# Altium PCB somiqboard.PcbDoc (part 6 of 10)
Units mm, origin at the board's own origin, x right, y up, seen from the top; angles counter-clockwise.
Board outline 110 x 96 mm, 4 copper layers (Top Layer, Ground_Plane, Power_Plane, Bottom Layer), stack 1.454 mm thick; 221 components, 356 nets, 1185 pads, 539 vias.
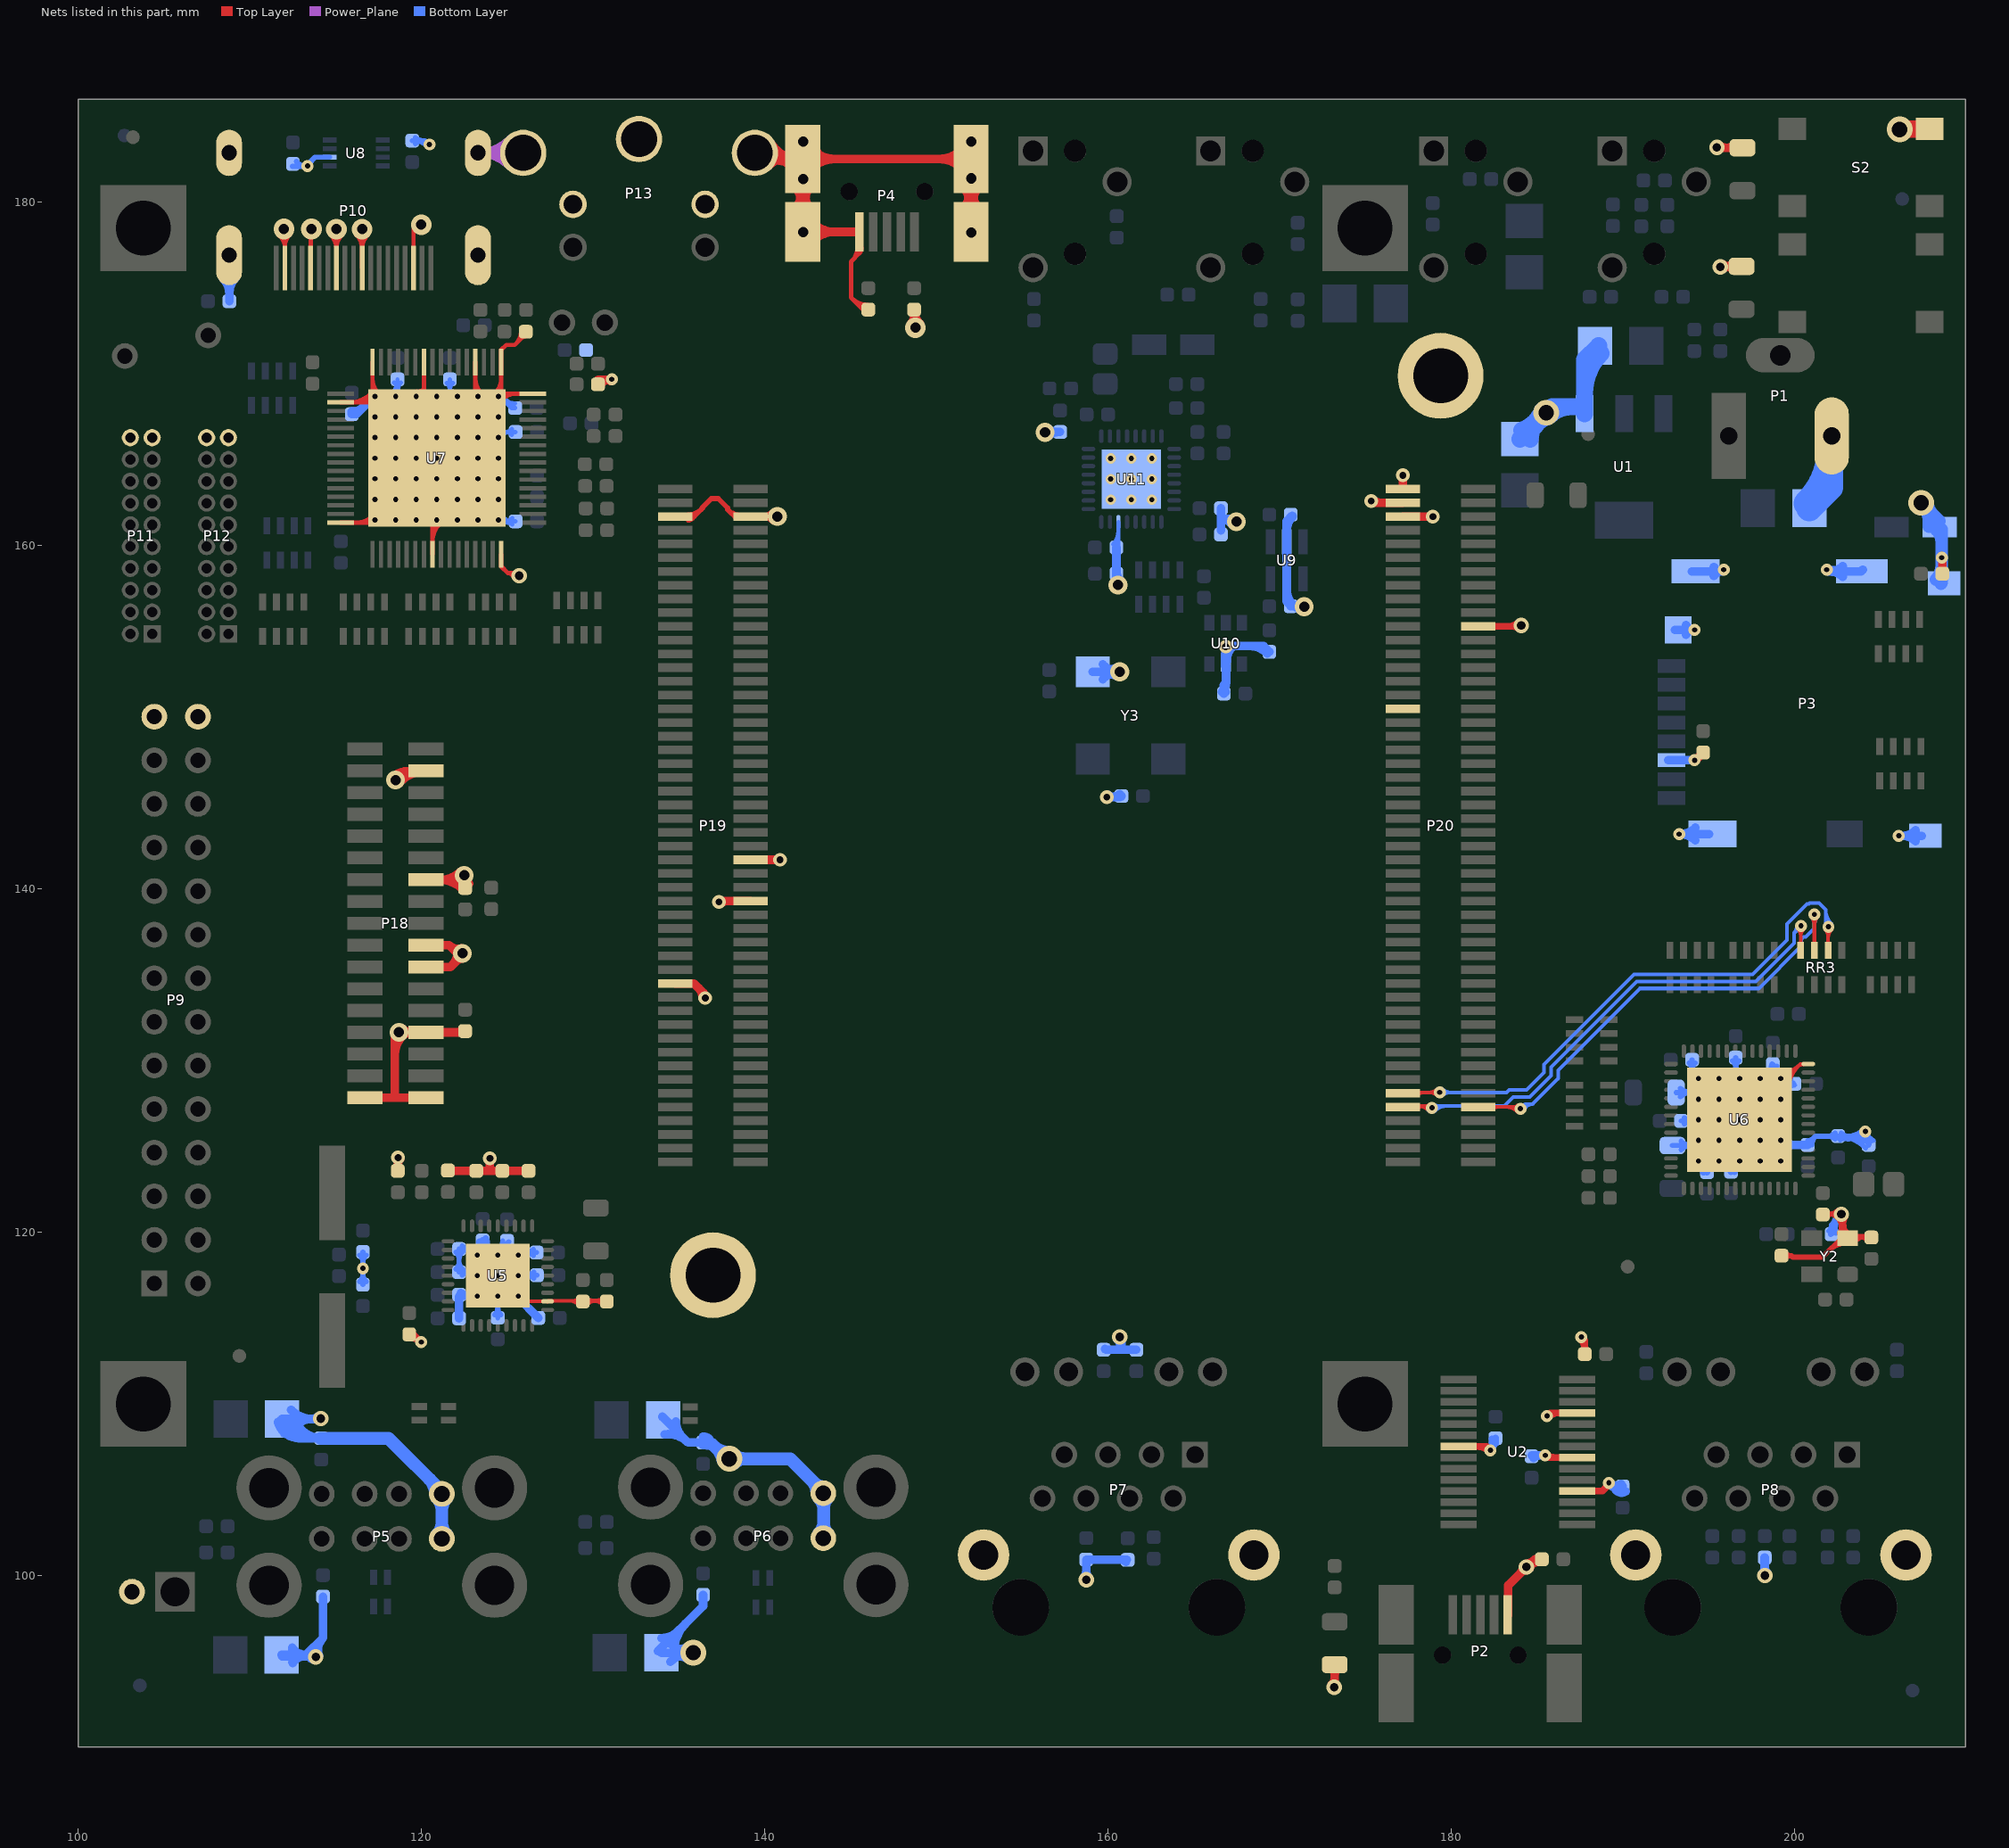
[diagram p8: the nets of this part, all layers, seen from the top]

## Via types
v1: diameter 0.7/0.7/0.7/0.7 (per signal layer), hole 0.3, Top Layer to Bottom Layer, tented both sides, 270 vias
v2: diameter 0.8, hole 0.3, Top Layer to Bottom Layer, tented both sides, 49 vias
v3: diameter 0.6/0.7/0.7/0.6 (per signal layer), hole 0.3, Top Layer to Bottom Layer, tented both sides, 47 vias
v4: diameter 0.6, hole 0.3, Top Layer to Bottom Layer, tented both sides, 43 vias
v5: diameter 1.1/1.1/1.1/1.1 (per signal layer), hole 0.6, Top Layer to Bottom Layer, tented both sides, 32 vias
v6: diameter 0.8/0.8/0.8/0.8 (per signal layer), hole 0.4, Top Layer to Bottom Layer, tented both sides, 31 vias
v7: diameter 0.9/0.9/0.9/0.9 (per signal layer), hole 0.5, Top Layer to Bottom Layer, tented both sides, 29 vias
v8: diameter 1.5/1.5/1.5/1.5 (per signal layer), hole 0.9, Top Layer to Bottom Layer, tented both sides, 14 vias
v9: diameter 1.2/1.2/1.2/1.2 (per signal layer), hole 0.6, Top Layer to Bottom Layer, tented both sides, 10 vias
v10: diameter 0.8/0.8/0.8/0.8 (per signal layer), hole 0.5, Top Layer to Bottom Layer, tented both sides, 6 vias
v11: diameter 1/1/1/1 (per signal layer), hole 0.5, Top Layer to Bottom Layer, tented both sides, 3 vias
v12: diameter 0.8/0.8/0.8/0.8 (per signal layer), hole 0.8, Top Layer to Bottom Layer, tented both sides, 2 vias
v13: diameter 1.2/1.2/1.2/1.2 (per signal layer), hole 1.2, Top Layer to Bottom Layer, tented both sides, 2 vias
v14: diameter 0.6/0.6/0.6/0.6 (per signal layer), hole 0.3, Top Layer to Bottom Layer, tented both sides, 1 vias

## Nets (pads, with @x,y where several pads share a name; then routed paths per layer and width w, separated by ;. In a path a pad name is that pad's centre, name@x,y a point inside that pad or via, vN(x,y) a via of type N, cw(c..) or ccw(c..) an arc to the next point about the centre after c; other vN are vias at no path point) (continued)
GND: B1.2 C1.2 C2.2 C3.2 C4.1 C5.1 C6.2 C7.1 C8.2 C9.2 C10.2 C12.2 C13.2 C14.1 C15.1 C16.2 C17.2 C18.2 C19.2 C20.2 C21.2 C22.2 C23.2 C24.2 C25.2 C26.2 C27.2 C28.2 C29.2 C30.2 C31.2 C32.2 C33.2 C34.2 C35.2 C36.2 C37.2 C38.1 C39.1 C40.1 C41.1 C42.1 C43.1 C44.2 C45.1 C46.1 C47.1 C48.1 C49.1 C50.1 C51.2 C52.1 C53.2 C54.2 C55.2 C56.2 C57.2 C58.2 C59.2 C60.2 C61.2 C63.2 C67.2 C68.2 C70.2 C74.2 C77.2 C79.2 C84.2 C85.2 D1.2 D2.2 D3.2 L1.2 P1.2 P2.5 P3.6 P3.9 P3.11 P3.12 P3.13 P3.14 P3.15 P4.5 P4.6 P4.7 P5.A4 P5.B4 P6.A4 P6.B4 P7.13 P8.13 P9.27 P9.28 P10.2 P10.5 P10.8 P10.11 P10.17 P10.20 P10.21 P10.22 P10.23 P11.19 P11.20 P12.19 P12.20 P13.1 P13.2 P13.5 P13.6 P13.7 P18.4 P18.14 P18.20 P18.22 P18.28 P18.33 P18.34 P19.5 P19.6 P19.55 P19.61 P19.74 P20.2 P20.4 P20.6 P20.21 pad.0@137,117.5 pad.0@179.4,169.9 R4.1 R6.2 R8.2 R9.2 R10.2 R11.2 R16.1 R17.1 R18.1 R19.1 R20.2 R33.1 R36.1 R48.1 R58.1 R100.2 S2.2 U1.1 U2.7 U2.18 U2.21 U2.25 U5.11 U5.37 U6.14 U6.57 U7.16 U7.17 U7.20 U7.26 U7.32 U7.34 U7.48 U7.56 U7.64 U7.65 U8.2 U9.2 U10.2 U11.6 U11.33 Y2.2 Y3.2 | length 672.4
  Top Layer w0.12: v9@112.053,178.422 v9@112.065,178.434
  Top Layer w0.2: U5.37@125.683,116.076 cw(c125.725,115.725) U5.37@125.975,115.975 ; U5.37@125.729,116.087 cw(c125.785,115.935) U5.37@125.9,116.05 ; U5.37@125.853,116.224 ccw(c126.027,116.177) U5.37@125.9,116.05 ; U5.37@125.86,116.268 ccw(c126.254,116.254) U5.37@125.975,115.975 ; U5.11@127.35,115.95 127.4,116 C22.2@129.45,116 ; U5.11@127.36,115.975 U5.37@125.975,115.975 ; 128.619,116 cw(c128.619,115.177) C22.2@129.201,115.759 ; 128.759,116 ccw(c128.759,116.625) C22.2@129.201,116.183 ; U6.57@197.618,128.553 ccw(c198.26,130.17) U6.57@199.49,128.94 ; U6.57@197.691,128.739 ccw(c198.382,130.478) U6.57@199.705,129.155 ; U6.57@197.765,128.925 ccw(c198.504,130.785) 199.92,129.37 ; U6.57@197.839,129.111 ccw(c198.627,131.093) 200.135,129.585 ; U6.57@197.913,129.297 ccw(c198.749,131.401) 200.35,129.8 ; U6.57@198.009,129.265 cw(c197.911,128.967) U6.57@198.223,128.934 ; v4(198.024,128.955) cw(c198.36,128.836) U6.57@198.392,129.191 ; U6.57@198.148,128.798 cw(c198.321,128.58) U6.57@198.353,128.856 ; U6.57@198.181,129.079 ccw(c198.72,129.505) U6.57@198.64,128.823 ; U6.57@198.213,128.888 cw(c198.611,128.747) U6.57@198.649,129.168 ; U6.57@198.222,128.927 cw(c198.362,128.908) U6.57@198.378,129.048 ; U6.57@198.453,128.637 ccw(c198.242,129.576) U6.57@199.055,129.062 ; U6.57@198.637,128.447 ccw(c198.231,129.151) U6.57@199.028,128.994 ; U6.57@198.667,128.841 ccw(c198.583,129.437) U6.57@199.064,129.075 ; U6.57@198.674,129.179 cw(c198.678,128.403) v4(199.224,128.955) ; U6.57@198.834,128.865 cw(c198.885,128.505) U6.57@199.104,128.795 ; U6.57@198.924,128.744 ccw(c198.819,129.211) v4(199.224,128.955) ; U6.57@199.018,128.668 ccw(c198.805,129.038) v4(199.224,128.955) ; U6.57@199.075,128.822 cw(c198.693,128.482) U6.57@199.159,128.272 ; U6.57@199.096,127.154 cw(c201.014,127.66) U6.57@199.612,129.062 ; U6.57@199.102,127.596 cw(c198.821,127.231) U6.57@199.279,127.291 ; U6.57@199.104,127.915 ccw(c198.445,128.797) U6.57@199.535,128.64 ; U6.57@199.114,127.922 ccw(c198.861,128.308) U6.57@199.313,128.214 ; U6.57@199.12,128.061 ccw(c199.393,127.983) v4(199.224,127.755) ; U6.57@199.177,128.761 ccw(c199.263,129.118) U6.57@199.56,128.901 ; U6.57@199.199,128.338 ccw(c199.576,128.231) U6.57@199.343,127.916 ; U6.57@199.224,129.155 ccw(c199.224,130.316) 200.045,129.495 ; U6.57@199.265,129.151 ccw(c199.387,129.736) U6.57@199.714,129.236 ; U6.57@199.271,129.149 ccw(c199.416,129.75) 199.914,129.385 ; U6.57@199.28,129.147 ccw(c199.34,129.356) U6.57@199.445,129.165 ; U6.57@199.283,127.26 cw(c199.783,127.326) U6.57@199.383,127.633 ; U6.57@199.286,128.554 ccw(c198.945,128.707) v4(199.224,128.955) ; U6.57@199.29,127.205 cw(c201.403,127.762) U6.57@199.858,129.308 ; U6.57@199.319,128.244 ccw(c199.813,128.142) U6.57@199.391,127.865 ; U6.57@199.333,129.123 ccw(c199.497,129.374) U6.57@199.673,129.132 ; U6.57@199.35,129 U6.57@199.55,129 ; U6.57@199.379,129.081 ccw(c199.55,129.22) U6.57@199.55,129 ; U6.57@199.409,128.879 cw(c200.546,128.413) 200.072,129.547 ; U6.57@199.416,128.899 cw(c200.135,128.691) U6.57@199.774,129.346 ; U6.57@199.416,128.899 cw(c199.55,128.861) U6.57@199.55,129 ; U6.57@199.42,128.914 cw(c199.78,128.839) U6.57@199.579,129.147 ; U6.57@199.466,128.162 cw(c198.854,128.25) v4(199.224,127.755) ; U6.57@199.469,127.351 ccw(c198.859,127.258) v4(199.224,127.755) ; U6.57@199.483,127.256 cw(c201.793,127.865) 200.104,129.554 ; U6.57@199.626,129.36 ccw(c199.915,128.672) v4(199.224,128.955) ; U6.57@199.677,127.307 cw(c202.182,127.968) 200.35,129.8 ; U6.57@199.704,129.154 cw(c199.224,129.633) v4(199.224,128.955) ; U6.57@199.737,129.143 cw(c199.339,129.434) v4(199.224,128.955) ; 200.175,129.625 cw(c200.549,129.251) U6.14@200.549,129.78 ; U6.14@200.824,129.805 200.819,129.8 200.35,129.8 ; C45.1@201.676,121.085 v7@202.415,121.085 ; C45.1@201.821,121.085 cw(c201.821,120.121) v7@202.503,120.803 ; C45.1@201.888,121.243 ccw(c202.27,121.625) 202.27,121.085 ; C45.1@201.91,120.843 cw(c202.415,120.437) v7@202.415,121.085 ; C45.1@201.99,121.085 ccw(c201.99,121.81) v7@202.503,121.297 ; v7@202.65,121.05 v7@202.415,121.085 ; U5.37@125.9,116.05 U5.37@125.975,115.975 ; U6.57@199.55,129 200.35,129.8 ; U6.57@197.869,128.828 ccw(c198.248,129.139) 198.2,128.651 cw(c198.248,129.139) U6.57@197.869,128.828
  Top Layer w0.21: P10.2@112.053,176.167 P10.2@112.053,177.38
  Top Layer w0.25: v9@111.711,178.073 cw(c111.177,177.379) P10.2@112.053,177.379 ; P10.2@112.053,177.38 v9@112.053,178.422 ; P10.2@112.053,177.43 cw(c113.02,177.43) v9@112.336,178.114 ; P10.5@113.563,176.153 v9@113.563,178.41 ; v9@114.717,178.112 cw(c113.906,177.301) 115.053,177.301 cw(c116.199,177.301) v9@115.388,178.112 ; P10.8@115.053,176.167 v9(115.053,178.447) ; U7.48@115.304,161.35 117.15,161.35 U7.65@117.2,161.4 ; U7.34@115.304,168.35 117.35,168.35 U7.65@117.45,168.45 ; U7.34@115.795,168.35 ccw(c115.795,170.209) U7.65@117.11,168.894 ; v9@116.217,178.112 cw(c115.406,177.301) 116.553,177.301 cw(c117.699,177.301) v9@116.888,178.112 ; 116.278,161.35 ccw(c116.278,162.526) U7.65@117.11,161.694 ; 116.399,168.35 ccw(c116.399,169.605) U7.65@117.286,168.718 ; P10.11@116.553,176.167 v9(116.553,178.447) ; 116.882,161.35 ccw(c116.882,161.922) U7.65@117.286,161.518 ; U7.65@117.002,168.35 ccw(c117.002,169.002) U7.65@117.463,168.541 ; U7.65@117.154,168.904 U7.32@117.154,170.7 ; 117.154,169.122 ccw(c117.726,169.122) U7.65@117.322,168.718 ; 117.154,169.726 ccw(c118.33,169.726) U7.65@117.498,168.894 ; P10.17@119.553,176.167 119.553,178.453 119.556,178.45 119.85,178.45 v9@120,178.3 ; U7.65@119.7,168.675 120.154,169.129 ; U7.65@119.728,168.974 ccw(c119.775,169.508) 120.154,169.129 ; U7.65@119.847,168.935 ccw(c119.966,169.129) 120.078,168.931 ccw(c120.176,168.756) U7.65@119.977,168.732 ; U7.65@119.94,168.853 ccw(c119.869,169.129) 120.154,169.129 ; U7.65@119.979,168.702 cw(c120.576,168.706) 120.154,169.129 ; U7.26@120.154,170.7 120.154,169.129 ; U7.56@120.654,159.5 120.654,161.304 U7.65@120.9,161.55 ; U7.56@120.654,160.233 cw(c122.171,160.233) U7.65@121.098,161.306 ; 120.654,160.836 cw(c121.568,160.836) U7.65@120.922,161.482 ; U7.65@123.154,169.023 ccw(c124.827,169.023) U7.65@123.644,167.84 ; 123.154,169.122 ccw(c123.726,169.122) U7.65@123.322,168.718 ; 123.154,169.726 ccw(c124.33,169.726) U7.65@123.498,168.894 ; U7.20@123.154,170.7 123.154,169.071 U7.65@123.475,168.75 ; U7.65@123.211,168.441 cw(c123.135,168.231) 123.351,168.289 cw(c123.488,168.326) U7.65@123.425,168.453 ; U7.65@124.31,168.894 ccw(c123.478,169.726) 124.654,169.726 ; U7.65@124.486,168.718 ccw(c124.082,169.122) 124.654,169.122 ; U7.65@124.5,168.7 124.65,168.85 U7.65@124.654,168.85 ; U7.65@124.522,168.682 cw(c124.926,168.278) 124.926,168.85 ; U7.64@124.654,159.5 124.654,158.796 125.05,158.4 ; U7.65@124.654,168.604 U7.65@124.654,168.7 ; U7.65@124.698,168.506 cw(c125.53,167.674) 125.53,168.85 ; v7@125.39,158.151 ccw(c125.05,158.043) 125.05,158.4 ; 125.533,171.783 ccw(c124.85,172.466) C53.2@125.816,172.466 ; v7(125.7,158.25) 125.7,158.4 125.05,158.4 ; C53.2@125.835,172.085 cw(c126.091,171.829) C53.2@126.091,172.191 ; C53.2@126.1,172.5 126.1,172.35 125.45,171.7 124.95,171.7 124.654,171.404 U7.17@124.654,170.7 U7.65@124.654,168.85 ; U7.16@126.504,168.85 U7.65@124.654,168.85 ; C22.2@129.45,116 129.472,116.022 C24.2@130.886,116.022 ; C22.2@129.607,115.777 cw(c130.2,115.184) 130.2,116.022 ; C22.2@129.607,116.165 ccw(c129.954,116.512) 129.954,116.022 ; 130.023,116.022 cw(c130.023,115.184) C24.2@130.616,115.777 ; 130.269,116.022 ccw(c130.269,116.512) C24.2@130.616,116.165 ; 145.058,174.442 ccw(c146.05,175.434) R100.2@146.05,174.031 ; 145.082,176.582 ccw(c144.283,177.381) P4.5@145.413,177.381 ; P4.5@145.45,177.293 cw(c145.236,177.079) 145.538,177.079 cw(c145.84,177.079) P4.5@145.626,177.293 ; 145.485,174.015 ccw(c146.05,174.58) R100.2@146.05,173.781 ; 145.509,177.009 ccw(c145.137,177.381) P4.5@145.663,177.381 ; P4.5@145.538,178.281 145.538,177.038 145.05,176.55 145.05,174.45 145.8,173.7 R100.2@146.05,173.7
  Top Layer w0.3: P19.6@134.8,161.7 135.9,161.7 136.4,162.2 136.4,162.24 136.91,162.75 137.3,162.75 137.85,162.2 137.85,162.105 138.055,161.9 ; P19.6@135.55,161.5 ccw(c135.55,161.862) 135.806,161.606 ; P19.6@135.55,161.8 ccw(c135.55,162.886) 136.318,162.118 ; P19.5@138.25,161.7 138.25,161.8 138.15,161.9 ; P19.5@138.354,161.673 ccw(c138.055,161.59) 138.055,161.9 ; P19.5@138.426,161.797 cw(c138.331,162.176) 138.055,161.9 ; P19.5@138.439,161.799 cw(c138.399,162.148) 138.15,161.9 ; P19.5@139.2,161.7 v5(140.75,161.7) ; P19.5@139.783,161.7 cw(c139.783,160.733) v5@140.467,161.417 ; P19.5@139.785,161.7 ccw(c139.785,162.665) v5@140.467,161.983 ; v7@184.05,155.3 v7(184.1,155.35) ; R20.2@199.263,118.638 199.838,118.638 ; R20.2@199.446,118.467 cw(c199.838,118.102) 199.838,118.638 ; R20.2@199.446,118.809 ccw(c199.838,119.174) 199.838,118.638 ; 202.079,118.979 cw(c202.975,118.083) Y2.2@202.975,119.35 ; v7@202.538,120.838 cw(c202.026,120.326) 202.75,120.326 cw(c203.474,120.326) v7@202.962,120.838 ; v7@202.6,120.79 cw(c202.296,120.264) 202.883,120.422 ; Y2.2@202.65,119.95 202.7,119.9 202.75,119.95 v7(202.75,121.05) ; 202.75,120.193 ccw(c203.518,120.193) Y2.2@202.975,119.65 ; v7@202.75,120.917 ccw(c204.242,120.917) Y2.2@203.187,119.862 ; 202.926,120.262 cw(c203.738,120.479) v7@203.01,120.9 ; Y2.2@203.487,119.862 ccw(c203.731,120.106) 203.731,119.761 ; Y2.2@203.495,119.446 cw(c204.216,118.778) 204.216,119.761 202.839,119.761 202.85,119.75 201.65,118.55 199.926,118.55 199.838,118.638 ; 203.749,119.761 cw(c203.749,118.949) C50.1@204.323,119.523 ; 204.044,119.761 ccw(c204.044,120.156) C50.1@204.323,119.877 ; 138.055,161.9 138.15,161.9
  Top Layer w0.305: P13.5@139.45,182.8 139.719,182.531 P4.6@142.238,182.531 cw(c142.238,184.63) P13.5@140.456,183.521 ; P13.5@139.939,183.198 ccw(c141.14,183.946) 141.14,182.531 ; P13.5@139.971,182.17 cw(c140.585,181.343) 140.852,182.338 ; P13.5@140.198,183.359 ccw(c141.689,184.288) P4.6@141.689,182.531 ; P13.5@140.286,182.041 cw(c141.47,180.857) P4.6@141.47,182.531 ; P13.5@140.319,183.042 ccw(c141.242,183.204) 141,182.298 ; P4.6@141.621,181.914 ccw(c140.131,180.424) 140.131,182.531 ccw(c140.131,184.638) P4.6@141.621,183.148 ; P4.6@141.837,182.13 ccw(c140.867,181.16) 140.867,182.531 ccw(c140.867,183.902) P4.6@141.837,182.932
  Top Layer w0.4: R11.2@119.3,114.05 119.55,114.05 v3(120,113.6) ccw(c119.388,112.988) R11.2@119.316,113.851 ; U2.7@180.45,107.525 182.075,107.525 v3(182.3,107.3) ; 181.515,107.525 cw(c181.515,106.515) v3@182.229,107.229 ; P20.21@181.6,155.3 v7@184.05,155.3 ; 183.376,155.3 ccw(c183.376,156.074) v7@183.923,155.527 ; 183.617,155.3 cw(c183.617,154.867) v7@183.923,155.173 ; v3(185.5,107) 185.625,106.875 U2.21@187.35,106.875 ; v3@185.571,107.071 ccw(c186.043,107.543) 186.043,106.875 ; v3(185.6,109.3) 185.775,109.475 U2.25@187.35,109.475 ; v3@185.671,109.229 cw(c186.264,108.636) 186.264,109.475 ; U2.18@187.35,104.925 188.825,104.925 v3@189.2,105.3 ; v3@187.529,113.829 cw(c186.876,113.176) R4.1@187.8,113.176 ; v3(187.6,113.9) 187.8,113.7 R4.1@187.8,112.9 ; R4.1@187.659,113.041 ccw(c187.317,113.383) 187.8,113.383 ccw(c188.283,113.383) R4.1@187.941,113.041 ; 188.959,105.059 ccw(c188.617,105.4) v3@189.1,105.4
  Top Layer w0.5: P18.33@116.716,127.839 118.461,127.839 ; v5@118.343,146.474 cw(c119.119,145.861) 119.119,146.85 ; 118.461,130.345 cw(c120.005,130.345) 118.913,131.437 cw(c119.425,130.925) 119.425,131.649 cw(c119.425,132.373) v5@118.913,131.861 ; v5@118.505,146.65 ccw(c118.516,147.334) 119,146.85 ; v5@118.577,146.639 ccw(c118.716,147.158) 118.985,146.693 ; v5@118.6,131.65 118.461,131.511 118.461,127.839 ; R6.2@118.633,123.579 118.633,124.333 v6(118.65,124.35) ; R6.2@118.633,123.947 cw(c119.053,123.947) v6@118.756,124.244 ; v5(118.701,131.649) P18.28@120.266,131.649 122.499,131.649 C85.2@122.55,131.7 ; v5@118.735,146.164 cw(c120.15,145.049) 120.15,146.85 119,146.85 ; v5@118.796,146.3 cw(c119.46,146.19) 119.123,146.773 ; v5@118.8,146.355 cw(c119.484,146.366) 119,146.85 ; 119.213,146.85 ccw(c119.213,147.297) P18.4@119.529,146.981 ; P18.4@119.59,146.763 ccw(c119.354,145.796) v5@118.65,146.5 ; P18.4@120.15,146.889 P18.4@120.266,146.889 ; P18.34@120.266,127.839 118.461,127.839 ; P18.22@120.266,135.459 121.709,135.459 v5@122.35,136.1 ; P18.20@120.266,136.729 121.621,136.729 ; P18.14@120.266,140.539 122.011,140.539 C84.2@122.55,140 ; P18.14@121.039,140.539 cw(c121.039,138.545) C84.2@122.449,139.955 ; P18.14@121.146,140.539 ccw(c121.146,142.153) v5@122.288,141.012 ; C14.1@121.5,123.6 121.521,123.579 R10.2@123.205,123.579 124,123.579 ; C14.1@121.66,123.705 ccw(c121.964,124.009) 121.964,123.579 ; 121.817,135.567 ccw(c121.134,136.25) v5@122.1,136.25 ; 122.024,131.649 ccw(c122.024,132.25) C85.2@122.449,131.825 ; 122.058,135.808 cw(c122.4,135.467) v5@122.4,135.95 ; C84.2@122.186,140.364 ccw(c122.555,140.732) C84.2@122.555,140.211 ; v5@122.2,136.15 121.621,136.729 ; v5@122.246,140.539 cw(c122.246,139.752) C84.2@122.802,140.308 ; v5@122.312,140.566 cw(c121.905,140.059) C84.2@122.555,140.059 ; v5@122.323,136.54 cw(c122.136,137.244) 121.621,136.729 ; v5(122.5,140.8) 122.55,140.85 122.555,140.845 C84.2@122.555,140.061 ; C84.2@122.555,140.209 cw(c123.091,140.209) v5@122.712,140.588 ; v6(124,124.3) 124,123.579 ; R8.2@126.253,123.579 R9.2@124.729,123.579 124,123.579 ; R36.1@130.302,169.672 v1@130.928,169.672 ; R36.1@130.439,169.343 cw(c130.928,169.144) v1@130.928,169.672 ; v1@131,169.6 v1@130.928,169.672 ; P19.74@134.8,134.5 135.886,134.5 136.45,133.936 136.45,133.75 v6(136.55,133.65) ; 136.162,134.224 cw(c135.588,133.65) v6@136.4,133.65 ; v6(137.35,139.25) 137.4,139.3 P19.61@139.2,139.3 ; v6@137.456,139.144 cw(c137.833,138.767) 137.833,139.3 ; P19.55@139.2,141.7 v6(140.9,141.7) ; P4.6@141.69,179.554 ccw(c140.367,180.877) 142.238,180.877 ccw(c144.109,180.877) P4.6@142.786,179.554 ; P4.6@141.69,181.008 cw(c140.367,179.685) 142.238,179.685 cw(c144.109,179.685) P4.6@142.786,181.008 ; P4.6@141.811,179.652 ccw(c141.471,180.167) 142.066,180.326 ccw(c143.011,180.58) P4.6@142.58,179.702 ; P4.6@141.896,179.702 ccw(c141.465,180.58) 142.41,180.326 ccw(c143.005,180.167) P4.6@142.665,179.652 ; P4.6@141.99,181.2 cw(c141.034,180.648) 142.1,180.362 ; P4.6@142.038,178.481 ccw(c141.555,178.964) P4.6@142.238,178.964 ; P4.6@142.038,181.138 cw(c141.554,180.654) P4.6@142.238,180.654 ; P4.6@142.238,179.022 ccw(c143.003,179.022) 142.462,178.481 ccw(c142.945,178.964) P4.6@142.945,178.281 ; P4.6@142.238,180.597 cw(c143.002,180.597) P4.6@142.462,181.138 ; P4.6@142.238,182.046 cw(c141.554,182.046) 142.038,181.562 ccw(c141.525,182.074) 142.25,182.074 ccw(c142.974,182.074) 142.462,181.562 cw(c143.002,182.102) P4.6@142.238,182.102 ; P4.6@142.238,182.797 cw(c143.002,182.797) 142.462,183.338 ccw(c142.974,182.825) 142.25,182.825 ccw(c141.525,182.825) 142.038,183.338 cw(c141.554,182.854) P4.6@142.238,182.854 ; P4.6@142.25,178.1 142.238,178.112 P4.6@142.238,178.281 ; v5(142.25,178.269) P4.6@142.238,178.281 ; v5(142.25,181.35) P4.6@142.25,182.531 ; 142.392,180.304 cw(c143.532,180.609) P4.6@142.51,181.2 ; P4.6@142.462,178.057 cw(c143.003,177.516) P4.6@143.003,178.281 ; P4.6@142.539,183.627 ccw(c143.699,183.938) P4.6@143.099,182.898 ; P4.6@142.55,183.556 ccw(c143.162,183.569) P4.6@142.856,183.039 ; P4.6@142.786,177.733 cw(c144.109,176.41) 144.109,178.281 cw(c144.109,180.152) P4.6@142.786,178.829 ; P4.6@142.786,181.983 cw(c144.109,180.66) 144.109,182.531 cw(c144.109,184.402) P4.6@142.786,183.079 ; P4.5@145.45,178.2 145.369,178.281 P4.6@142.238,178.281 ; v9@148.553,172.947 ccw(c148.155,173.345) 148.717,173.345 ; v9@148.717,172.817 C16.2@148.717,173.756 ; C16.2@148.717,173.745 ccw(c149.845,173.745) v9@149.047,172.947 ; P4.7@151.49,179.554 ccw(c150.167,180.877) 152.038,180.877 ccw(c153.909,180.877) P4.7@152.586,179.554 ; P4.7@151.49,181.008 cw(c150.167,179.685) 152.038,179.685 cw(c153.909,179.685) P4.7@152.586,181.008 ; P4.7@151.49,181.983 ccw(c150.167,180.66) 150.167,182.531 ccw(c150.167,184.402) P4.7@151.49,183.079 ; P4.7@151.611,179.652 ccw(c151.271,180.167) 151.866,180.326 ccw(c152.811,180.58) P4.7@152.38,179.702 ; P4.7@151.696,179.702 ccw(c151.265,180.58) 152.21,180.326 ccw(c152.805,180.167) P4.7@152.465,179.652 ; P4.7@151.79,181.25 cw(c150.796,180.676) 151.905,180.379 ; P4.7@151.838,178.462 ccw(c151.354,178.946) P4.7@152.038,178.946 ; P4.7@151.838,181.188 cw(c151.354,180.704) P4.7@152.038,180.704 ; P4.7@151.95,182.5 151.919,182.531 P4.6@142.25,182.531 ; P4.7@152.038,178.281 152.038,178.261 v5(152.05,178.25) P4.7@152.05,178.15 ; P4.7@152.038,178.312 P4.7@152.038,182.531 152.038,183.538 v5(152.05,183.55) v5(152.05,181.4) ; P4.7@152.038,179.002 ccw(c152.802,179.002) P4.7@152.262,178.462 ; P4.7@152.038,180.648 cw(c152.802,180.648) P4.7@152.262,181.188 ; P4.7@152.038,182.096 cw(c151.354,182.096) 151.838,181.612 ccw(c151.325,182.125) 152.05,182.125 ccw(c152.774,182.125) 152.262,181.612 cw(c152.802,182.153) P4.7@152.038,182.153 ; P4.7@152.038,182.797 cw(c152.802,182.797) 152.262,183.338 ccw(c152.774,182.825) 152.05,182.825 ccw(c151.325,182.825) 151.838,183.338 cw(c151.354,182.854) P4.7@152.038,182.854 ; 152.187,180.321 cw(c153.371,180.638) P4.7@152.31,181.25 ; v7(160.7,113.9) v7@160.7,113.95 ; D3.2@173.051,94.631 cw(c172.624,94.204) 173.228,94.204 cw(c173.832,94.204) D3.2@173.405,94.631 ; v7@173.059,93.641 ccw(c172.65,94.05) 173.228,94.05 ; v7(173.2,93.5) 173.228,93.528 D3.2@173.228,94.807 ; v6@175.35,162.6 175.4,162.55 175.35,162.5 P20.4@177.2,162.5 ; v6@175.456,162.706 ccw(c175.952,163.202) 175.952,162.5 ; P20.6@177.2,161.7 v6@178.949,161.7 ; P20.2@177.2,163.3 v6(177.2,164.1) ; P2.5@183.3,97.65 183.337,97.687 183.337,99.437 v7(184.399,100.5) ; 184.058,100.158 ccw(c183.715,100.5) v7@184.199,100.5 ; 184.059,100.159 cw(c184.399,99.819) v7@184.399,100.3 ; v7@184.399,100.7 ccw(c184.399,101.305) 184.827,100.877 ; v7@184.451,100.693 ccw(c184.598,101.243) 184.883,100.75 ; v7@184.589,100.437 cw(c185.3,100.201) L1.2@185.3,100.95 ; L1.2@185.286,100.801 ccw(c185.187,99.763) 184.45,100.5 184.9,100.95 L1.2@185.3,100.95 ; v3(194.2,147.5) 194.25,147.5 C10.2@194.7,147.95 ; v7(195.5,183.2) 195.516,183.184 D1.2@196.986,183.184 ; v7@195.641,183.341 ccw(c196.021,183.721) 196.021,183.184 ; v7(195.7,176.25) 196.91,176.25 D2.2@196.936,176.275 ; v7@195.833,176.399 ccw(c196.117,176.716) D2.2@196.227,176.305 ; v7@195.841,176.109 cw(c196.183,175.767) 196.183,176.25 cw(c196.183,176.733) v7@195.841,176.391 ; v7@195.853,176.121 cw(c196.119,175.894) D2.2@196.21,176.232 ; v7@196.021,176.25 ccw(c196.021,176.94) D2.2@196.509,176.452 ; v7@196.143,176.25 cw(c196.143,175.733) D2.2@196.509,176.099 ; D1.2@196.56,183.007 ccw(c196.133,182.581) 196.133,183.184 ccw(c196.133,183.788) D1.2@196.56,183.361 ; v3@208.6,159.4 208.641,159.359 C9.2@208.641,158.369 ; v5@118.65,146.5 118.65,146.468 118.531,146.35 v5(118.5,146.35) v5@118.65,146.5 ; v5@118.65,146.5 119,146.85 ; P4.6@142.238,178.281 P4.6@142.238,182.531 ; P4.6@142.238,182.531 142.238,183.538 v5(142.25,183.55) P4.6@142.25,182.531 ; P4.6@142.238,182.531 P4.6@142.25,182.531
  Top Layer w1: v8(206.15,184.25) 206.177,184.277 S2.2@207.898,184.277
  Power_Plane w0.25: v9@112.039,178.435 v9@112.053,178.422
  Power_Plane w0.5: P10.23@123.656,182.534 cw(c124.51,181.68) 124.51,182.887 cw(c124.51,184.094) P10.23@123.656,183.241 ; 124.501,182.887 ccw(c124.501,184.311) P13.7@125.513,183.31 ; 124.502,182.887 cw(c124.502,181.463) P13.7@125.513,182.465 ; P13.7@125.158,183.661 cw(c123.303,185.497) P10.23@123.303,182.887 ; P13.7@125.158,182.113 ccw(c123.303,180.276) P10.23@123.303,182.887 ; P13.7@125.9,182.9 125.887,182.887 P10.23@123.303,182.887
  Bottom Layer w0.2: v4@199.247,128.756 cw(c199.289,128.391) 199.549,128.651 ; v4@199.276,128.762 cw(c199.354,128.47) 199.505,128.732 ; v4@199.419,128.781 ccw(c199.722,129.085) R16.1@199.968,128.733 ; v4@199.422,128.98 ccw(c199.856,129.033) R16.1@199.638,128.655 ; v4@199.424,128.954 ccw(c199.851,128.953) 199.549,128.651 ; 199.587,128.613 ccw(c199.861,128.886) R16.1@200.082,128.569 ; R16.1@199.754,128.522 ccw(c199.549,128.423) 199.549,128.651 ; R16.1@199.754,128.78 cw(c199.549,128.879) 199.549,128.651 ; R16.1@199.853,128.897 cw(c199.583,129.283) 199.25,128.95 199.549,128.651 ; R16.1@200.025,128.651 199.549,128.651
  Bottom Layer w0.25: v2@118.31,168.894 ccw(c117.565,169.639) C54.2@118.618,169.639 ; v2@118.366,168.938 ccw(c117.992,169.588) C54.2@118.716,169.394 ; C54.2@118.424,169.498 cw(c117.954,169.028) 118.618,169.028 cw(c119.282,169.028) C54.2@118.812,169.498 ; v2@118.6,168.75 118.618,168.768 C54.2@118.618,169.692 ; 118.618,169.089 ccw(c118.893,169.089) v2@118.698,168.894 ; 118.684,169.276 ccw(c119.243,169.126) v2@118.742,168.837 ; C55.2@121.484,169.485 cw(c121.131,169.084) 121.666,169.084 ; C55.2@121.666,169.692 121.666,169.084 ; 121.673,169.077 cw(c121.295,168.7) v2@121.829,168.7 ; C55.2@121.848,169.485 ccw(c122.201,169.084) 121.666,169.084 ; v2@122.049,168.969 cw(c121.964,169.382) 121.666,169.084 ; v2@122.1,168.65 121.666,169.084 ; v2@124.4,161.5 124.483,161.417 C56.2@125.496,161.417 ; v2@124.504,168.425 cw(c124.504,167.529) R33.1@125.137,168.163 ; v2@124.55,168.75 125.279,168.021 R33.1@125.476,168.021 ; v2@124.575,168.434 cw(c124.767,167.72) R33.1@125.137,168.36 ; v2@124.6,166.3 124.924,166.624 ; v2@124.603,166.556 ccw(c124.712,166.836) 124.924,166.624 ; v2@124.642,161.262 cw(c124.981,160.677) C56.2@125.156,161.33 ; v2@124.67,168.63 ccw(c125.476,169.436) R33.1@125.476,168.296 ; v2@124.698,161.306 cw(c124.968,161.036) 124.968,161.417 ; v2@124.698,161.694 ccw(c125.368,162.364) C56.2@125.368,161.417 ; v2@124.742,161.637 ccw(c125.303,161.961) C56.2@125.135,161.336 ; v2@124.77,168.771 ccw(c125.337,168.923) 125.044,168.414 ; v2@124.779,166.3 cw(c125.211,166.3) 124.906,166.606 ; v2@124.779,168.7 ccw(c125.211,168.7) 124.906,168.394 ; R33.1@125.097,168.203 ccw(c125.476,168.582) R33.1@125.476,168.046 ; C58.2@125.281,166.452 ccw(c124.924,166.167) 124.924,166.624 ; C58.2@125.281,166.796 cw(c124.924,167.081) 124.924,166.624 ; C56.2@125.302,161.223 ccw(c124.832,160.753) 124.832,161.417 ccw(c124.832,162.081) C56.2@125.302,161.611 ; C58.2@125.496,166.624 124.924,166.624 ; C74.2@160.314,160.087 ccw(c159.557,160.844) 160.627,160.844 ; C74.2@160.5,159.95 160.627,160.077 U11.6@160.627,161.385 ; v4@194.463,123.984 cw(c194.548,123.612) C43.1@194.818,123.882 ; C43.1@194.656,123.557 ccw(c193.913,123.713) 194.45,124.25 C43.1@194.818,123.882 ; 194.776,123.924 cw(c194.452,123.6) C43.1@194.901,123.505 ; C43.1@194.818,123.698 C43.1@194.818,123.882 ; C39.1@196.559,123.67 cw(c196.782,123.81) v4@196.596,123.996 ; C39.1@196.596,123.569 cw(c197.314,123.686) 196.8,124.2 v4@196.596,123.996 ; C39.1@196.596,123.698 196.596,123.796 v4@196.596,123.996 ; C39.1@196.596,123.73 cw(c196.847,123.73) v4@196.833,123.98
  Bottom Layer w0.3: C52.1@112.5,182.1 v3@113.275,182.1 ; C52.1@112.728,182.387 ccw(c113.275,182.765) v3@113.275,182.1 ; 112.953,182.1 ccw(c112.953,182.547) 113.269,182.231 cw(c113.091,182.41) 113.026,182.167 ; v3@113.073,182.1 cw(c113.073,181.823) v3@113.269,182.019 ; v3@113.525,182.125 cw(c114.068,182.125) 113.684,182.509 ; U8.2@114.655,182.63 113.805,182.63 v3@113.275,182.1 ; C12.2@116.423,117.127 ccw(c115.996,117.554) 116.6,117.554 ccw(c117.204,117.554) C12.2@116.777,117.127 ; C13.2@116.423,118.673 cw(c115.996,118.246) 116.6,118.246 cw(c117.204,118.246) C13.2@116.777,118.673 ; v3@116.494,117.794 cw(c116.238,117.538) 116.6,117.538 cw(c116.962,117.538) v3@116.706,117.794 ; v3@116.494,118.006 ccw(c116.238,118.262) 116.6,118.262 ccw(c116.962,118.262) v3@116.706,118.006 ; C12.2@116.6,116.95 v3(116.6,117.9) C13.2@116.6,118.85 ; C7.1@119.475,183.6 120.2,183.6 v3@120.525,183.275 ; C7.1@119.57,183.6 cw(c119.57,182.47) v3@120.369,183.269 ; C7.1@119.652,183.423 cw(c120.079,182.996) 120.079,183.6 cw(c120.079,184.204) C7.1@119.652,183.777 ; C18.2@122.028,117.855 ccw(c121.601,118.282) 122.205,118.282 ccw(c122.808,118.282) 122.382,117.855 ccw(c122.808,118.282) 122.808,117.678 ccw(c122.808,117.075) C18.2@122.382,117.501 ; C21.2@122.028,118.848 cw(c121.601,118.421) 122.205,118.421 cw(c122.808,118.421) 122.382,118.848 cw(c122.808,118.421) 122.808,119.024 cw(c122.808,119.628) C21.2@122.382,119.201 ; C18.2@122.205,117.678 123.022,117.678 v4@123.275,117.425 ; C18.2@122.205,117.745 C21.2@122.205,119.024 122.926,119.024 v4@123.275,118.675 ; C18.2@122.407,117.678 cw(c122.407,116.622) v4@123.154,117.369 ; 122.993,118.957 cw(c122.712,118.675) v4@123.11,118.675 ; 123.03,118.92 ccw(c123.26,119.151) v4@123.26,118.825 ; C17.2@124.283,115.193 ccw(c123.856,115.62) 124.46,115.62 ccw(c125.064,115.62) C17.2@124.637,115.193 ; v4@124.354,116.169 cw(c124.098,115.913) 124.46,115.913 cw(c124.822,115.913) v4@124.566,116.169 ; C17.2@124.46,115.017 v4@124.46,116.24 ; v4@124.46,118.84 124.46,118.81 C27.2@125.1,119.45 ; v4@124.467,118.817 ccw(c123.784,119.5) C27.2@124.75,119.5 ; v4@124.605,118.714 cw(c125.169,118.865) C27.2@124.663,119.157 ; v4@124.61,118.675 cw(c125.298,118.675) C27.2@124.812,119.162 ; v4@125.671,118.821 C26.2@126.715,118.821 ; v4@125.7,117.5 C25.2@126.741,117.5 ; v4@125.766,117.369 cw(c126.083,117.052) 126.083,117.5 ; v4@125.766,117.581 ccw(c125.961,117.776) 125.961,117.5 ; v4@125.766,118.569 cw(c126.375,117.96) C26.2@126.375,118.821 ; C26.2@126.538,118.644 ccw(c126.112,118.218) 126.112,118.821 ccw(c126.112,119.425) C26.2@126.538,118.998 ; C25.2@126.564,117.324 ccw(c126.137,116.897) 126.137,117.5 ccw(c126.137,118.104) C25.2@126.564,117.677 ; v5@140.6,161.5 140.6,161.55 v5(140.75,161.7) ; C37.2@192.913,125.055 194.105,125.055 v4@194.45,125.4 ; C36.2@193.127,128.143 194.007,128.143 v4@194.45,127.7 ; C37.2@193.338,125.055 ccw(c193.338,126.441) v4@194.318,125.461 ; C36.2@193.374,127.896 cw(c193.972,127.298) 193.972,128.143 cw(c193.972,128.988) C36.2@193.374,128.39 ; C37.2@193.41,124.808 cw(c194.008,124.21) 194.008,125.055 cw(c194.008,125.9) C37.2@193.41,125.302 ; C42.1@193.421,126.492 194.292,126.492 v4@194.4,126.6 ; C42.1@193.598,126.315 cw(c194.025,125.888) 194.025,126.492 cw(c194.025,127.096) C42.1@193.598,126.669 ; C49.1@193.879,129.871 cw(c193.452,129.444) 194.056,129.444 cw(c194.66,129.444) C49.1@194.233,129.871 ; 193.91,126.492 ccw(c193.91,127.069) v4@194.318,126.661 ; C49.1@194.056,130.048 194.056,129.394 v4@194.45,129 ; 194.062,125.055 ccw(c194.062,125.717) v4@194.53,125.249 ; 194.118,128.032 ccw(c194.424,128.337) v4@194.424,127.905 ; 194.118,129.332 cw(c193.74,128.955) v4@194.274,128.955 ; 194.135,125.085 cw(c194.424,124.797) v4@194.424,125.205 ; 194.181,125.131 ccw(c193.958,125.355) v4@194.274,125.355 ; 194.188,127.962 cw(c193.982,127.755) v4@194.274,127.755 ; C47.1@196.419,129.998 cw(c195.992,129.571) 196.596,129.571 cw(c197.2,129.571) C47.1@196.773,129.998 ; C47.1@196.596,129.868 ccw(c197.737,129.868) v4@196.93,129.061 ; C47.1@196.596,130.175 196.596,129.154 v4@196.75,129 ; C46.1@198.709,129.815 ccw(c199.082,129.646) 198.793,129.357 ; C46.1@198.755,129.794 198.755,129.395 199.1,129.05 cw(c199.505,129.455) C46.1@198.983,129.691 ; 198.918,129.232 ccw(c199.224,129.537) v4@199.224,129.105 ; 198.934,129.337 ccw(c199.362,129.584) v4@199.256,129.102 ; 198.988,129.162 cw(c198.782,128.955) v4@199.074,128.955 ; C41.1@200.75,125.1 201.25,125.6 204.275,125.6 204.343,125.532 ; C41.1@200.787,125.345 ccw(c200.787,125.847) 201.142,125.492 ; C41.1@201.037,125.095 cw(c201.742,125.095) 201.243,125.593 ; 201.954,125.6 ccw(c201.954,126.214) C38.1@202.388,125.78 ; 201.969,125.6 cw(c201.969,125.007) C38.1@202.388,125.426 ; C48.1@202.021,120.077 ccw(c201.713,120.434) 202.184,120.434 ; C48.1@202.136,119.876 cw(c202.848,120.058) 202.328,120.578 ; C48.1@202.184,119.888 202.184,120.434 ; 202.203,120.453 ccw(c201.605,121.05) v7@202.45,121.05 ; 202.323,120.573 cw(c202.75,120.146) v7@202.75,120.75 ; C48.1@202.347,120.077 cw(c202.655,120.434) 202.184,120.434 ; C48.1@202.426,119.95 cw(c203.44,120.21) 202.7,120.95 202.184,120.434 ; v7@202.469,120.945 cw(c201.962,120.755) 202.431,120.484 cw(c202.921,120.201) v7@202.809,120.756 ; C38.1@202.52,125.6 cw(c202.52,123.272) C40.1@204.166,124.918 ; C38.1@202.69,125.386 cw(c202.967,124.907) 203.11,125.442 ; C38.1@202.742,125.426 cw(c203.161,125.007) 203.161,125.6 ; C38.1@202.742,125.78 ccw(c203.176,126.214) 203.176,125.6 ; C38.1@202.782,125.728 ccw(c203.347,126.054) 203.178,125.424 ; 203.124,125.6 ccw(c203.124,126.901) v3@204.044,125.981 ; 203.245,125.6 cw(c203.245,123.997) C40.1@204.378,125.13 ; 203.848,125.6 ccw(c203.848,126.177) v3@204.256,125.769 ; v3@203.969,125.6 cw(c203.969,124.721) C40.1@204.59,125.342 ; v3@204.009,125.823 ccw(c204.51,126.008) C40.1@204.372,125.492 ; v3@204.046,125.767 cw(c203.38,125.072) C40.1@204.343,125.072 ; v3@204.13,125.726 cw(c204.096,125.481) C40.1@204.343,125.481 ; C40.1@204.216,125.311 ccw(c204.086,125.532) 204.343,125.532 ; v3@204.288,125.816 ccw(c204.526,125.715) 204.343,125.532 ; C40.1@204.343,125.095 204.343,125.532 ; C40.1@204.47,125.311 cw(c204.6,125.532) 204.343,125.532
  Bottom Layer w0.4: v4@123.199,118.754 ccw(c122.597,119.525) C15.1@123.575,119.525 123.575,118.975 v4@123.275,118.675 ; v4@123.25,118.65 v4@123.275,118.675 ; C15.1@123.397,119.435 cw(c122.811,119.139) v4@123.275,118.675 ; C15.1@123.434,119.384 cw(c123.092,119.042) 123.575,119.042 cw(c124.058,119.042) C15.1@123.716,119.384 ; 123.666,119.066 ccw(c123.33,119.401) C15.1@123.753,119.615 ; v3@182.4,107.3 cw(c182.883,107.3) C4.1@182.541,107.641 ; C4.1@182.404,107.962 cw(c181.677,107.823) 182.2,107.3 182.6,107.7 C4.1@182.6,108 ; v4@194.425,124.175 194.425,124 C43.1@194.925,123.5 ; v4@194.524,124.155 ccw(c195.137,124.155) C43.1@194.704,123.721 ; C43.1@194.725,123.5 ccw(c194.242,123.5) 194.584,123.841 ccw(c194.925,124.183) C43.1@194.925,123.7 ; C39.1@196.325,123.525 C39.1@196.596,123.796 ; C39.1@196.325,123.725 ccw(c196.325,124.208) 196.666,123.866 ccw(c197.008,123.525) C39.1@196.525,123.525 ; C39.1@196.364,123.692 ccw(c195.981,124.356) v4@196.727,124.178 ; C39.1@196.561,123.761 ccw(c196.166,124.155) v4@196.724,124.155 ; v4@196.825,124.175 196.825,124.025 C39.1@196.596,123.796 ; C39.1@196.596,123.796 ccw(c196.282,124.11) 196.724,124.147 cw(c196.282,124.11) C39.1@196.596,123.796
  Bottom Layer w0.5: P10.21@108.449,175.574 cw(c107.556,174.68) 108.819,174.68 ; C59.2@108.819,174.244 P10.21@108.819,177.031 ; 108.819,174.76 cw(c109.97,174.76) P10.21@109.156,175.574 ; C33.2@111.647,108.955 ccw(c112.877,109.278) 112.877,108.006 ; C33.2@111.8,109.05 112.844,108.006 ; C35.2@111.863,95.377 113.276,95.377 ; C33.2@111.888,109.118 114.182,109.118 v7(114.15,109.15) ; C35.2@111.9,95.3 113.199,95.3 ; C33.2@112.007,108.278 cw(c112.159,107.322) 112.844,108.006 ; C33.2@112.13,109.082 ccw(c113.525,109.448) 113.525,108.006 ; C33.2@112.419,108.588 cw(c113.699,107.308) 113.699,109.118 cw(c113.699,110.929) C33.2@112.419,109.649 ; C35.2@112.484,94.957 cw(c113.276,94.421) 113.276,95.377 ; C35.2@112.484,95.797 ccw(c113.276,96.333) 113.276,95.377 ; C35.2@112.493,95.684 ccw(c113.199,96.141) 113.199,95.3 ; C35.2@112.513,94.903 cw(c113.199,94.509) 113.199,95.3 ; C33.2@112.614,109.209 ccw(c114.173,109.618) C31.2@114.173,108.006 112.844,108.006 ; C33.2@112.616,108.835 ccw(c113.459,108.621) 112.844,108.006 ; 113.07,95.377 cw(c113.07,94.474) v7@113.709,95.113 ; v7@113.568,95.153 cw(c114.167,95.368) 113.717,95.817 ; 113.591,109.118 ccw(c113.591,109.709) v7@114.009,109.291 ; v7(113.85,95.254) 113.973,95.377 113.276,95.377 ; v7@114.038,95.321 cw(c114.988,95.662) 114.275,96.375 ; C34.2@114.275,98.775 114.275,96.375 ; C57.2@115.951,167.66 116.21,167.66 v2@117.25,168.7 ; C57.2@115.951,167.81 ccw(c115.951,168.797) 116.649,168.099 ; 116.956,168.406 cw(c117.304,168.057) v2@117.304,168.55 ; C23.2@122.205,114.986 122.205,116.255 122.25,116.3 v4@123.3,116.3 ; C20.2@122.311,116.463 ccw(c122.706,116.858) 122.706,116.3 ; v4@125.628,116.2 C19.2@126.817,115.011 ; v4@125.71,116.275 ccw(c126.089,116.275) 125.821,116.007 ; C32.2@133.8,95.6 136.423,98.223 C30.2@136.423,98.877 ; C32.2@133.986,95.504 v8(135.854,95.504) ; C32.2@133.986,96.354 ccw(c133.986,97.724) 134.955,96.755 ; C29.2@134.05,109.25 135.548,107.752 C28.2@136.423,107.752 136.998,107.752 v8(137.95,106.8) ; C29.2@134.18,108.223 cw(c134.381,106.586) 135.548,107.752 ; C32.2@134.517,94.974 cw(c135.797,93.693) 135.797,95.504 cw(c135.797,97.315) C32.2@134.517,96.034 ; C32.2@134.736,95.604 cw(c136.987,95.604) 135.396,97.196 ; C29.2@134.838,108.968 ccw(c136.059,108.968) 135.196,108.104 ; v8@135.389,95.319 ccw(c134.734,95.058) 134.916,95.74 ccw(c135.089,96.382) v8@135.526,95.881 ; v8@135.389,95.689 cw(c134.734,95.95) 134.916,95.268 cw(c135.089,94.626) v8@135.526,95.127 ; v8@135.5,95.15 ccw(c134.647,94.297) 134.647,95.504 ccw(c134.647,96.711) v8@135.5,95.858 ; C28.2@136.423,107.602 cw(c136.423,105.853) v8@137.66,107.09 ; C28.2@136.423,108.102 cw(c136.423,107.56) C28.2@136.806,107.944 ; C28.2@136.823,107.573 cw(c136.156,106.417) v8@137.461,106.696 ; 137.18,107.367 ccw(c137.602,108.099) v8@137.821,107.283 ; v8@137.45,106.8 ccw(c136.243,106.8) 137.096,107.654 ccw(c137.95,108.507) v8@137.95,107.3 ; v5@156.25,166.7 156.326,166.624 R48.1@157.226,166.624 ; v5@156.562,166.388 cw(c157.132,165.818) R48.1@157.132,166.624 ; v5@156.562,166.812 ccw(c157.016,167.266) R48.1@157.016,166.624 ; v7@158.609,99.891 ccw(c158.267,100.233) 158.75,100.233 ccw(c159.233,100.233) v7@158.891,99.891 ; v7(158.75,99.75) C44.2@158.75,100.934 R19.1@161.116,100.934 ; Y3.2@159.131,152.654 v5@160.696,152.654 ; Y3.2@159.713,152.218 cw(c160.696,151.328) v5@160.696,152.654 ; Y3.2@159.713,153.09 ccw(c160.696,153.98) v5@160.696,152.654 ; R18.1@159.85,113.2 159.893,113.157 160.8,113.157 ; v6(159.95,145.35) 160.737,145.35 C61.2@160.802,145.415 ; Y3.2@159.966,152.654 cw(c159.966,151.916) v5@160.488,152.438 ; Y3.2@159.985,152.654 ccw(c159.985,153.365) v5@160.488,152.862 ; v6@160.042,145.468 ccw(c160.316,145.82) C61.2@160.431,145.39 ; v6@160.283,145.35 ccw(c160.283,145.934) C61.2@160.696,145.521 ; v5@160.435,152.509 ccw(c159.86,152.204) 160.028,152.833 ccw(c160.2,153.474) v5@160.544,152.906 ; v5@160.435,152.791 cw(c159.878,153.09) 160.041,152.479 cw(c160.2,151.887) v5@160.535,152.399 ; C70.2@160.5,158.5 160.508,158.508 C74.2@160.508,159.893 ; v7@160.559,113.759 cw(c159.977,113.177) 160.8,113.177 ; v5(160.6,157.708) 160.6,157.65 160.508,157.558 C70.2@160.508,158.369 ; v7(160.7,113.9) 160.8,113.8 160.8,113.157 ; v5(160.7,152.65) v5@160.696,152.654 ; 160.753,100.934 cw(c160.753,100.504) R19.1@161.057,100.808 ; v5@160.781,157.947 cw(c161.196,158.496) 160.508,158.496 C70.2@160.508,158.369 ; R17.1@161.671,113.157 160.8,113.157 ; C77.2@166.6,160.9 166.604,160.904 166.604,161.55 ; C79.2@166.604,162.179 166.604,161.55 ; C63.2@166.665,151.49 ccw(c166.097,152.058) 166.9,152.058 ; C63.2@166.671,151.496 ccw(c166.213,152.008) 166.9,152.008 ; C63.2@166.771,151.384 166.771,151.879 166.9,152.008 ; U10.2@166.85,153 166.85,153.7 v6@166.878,153.728 ; 166.85,153.692 cw(c167.308,153.692) 166.984,154.016 cw(c167.308,153.692) 167.308,154.15 ; 166.85,153.699 cw(c167.291,153.699) v6@166.983,154.015 ; U10.2@166.878,153.105 v6@166.878,153.728 ; v6(166.878,154.122) v6@166.878,153.728 ; C63.2@166.884,151.483 cw(c167.171,151.737) 166.9,152.008 ; U10.2@166.9,153.05 166.9,152.008 ; U10.2@166.928,153.255 cw(c168.191,153.255) 167.298,154.148 ; v6@166.985,154.017 cw(c167.3,153.711) 167.3,154.15 ; v5@167.26,161.22 ccw(c166.604,160.732) 166.604,161.55 ; v5(167.5,161.4) 167.35,161.55 166.604,161.55 ; 168.252,154.15 cw(c168.252,152.651) C68.2@169.312,153.711 ; C68.2@169.418,153.817 169.085,154.15 167.3,154.15 ; 170.434,157.403 ccw(c171.595,157.403) C67.2@170.774,156.582 ; U9.2@170.434,160.883 cw(c171.595,160.883) C60.2@170.774,161.704 ; C67.2@170.6,156.6 170.434,156.766 U9.2@170.434,160.218 170.434,161.434 C60.2@170.75,161.75 ; C67.2@170.789,156.476 ccw(c170.789,157.111) v5@171.238,156.662 ; v5@171.237,156.239 ccw(c170.668,155.675) C67.2@170.668,156.476 171.424,156.476 v5(171.45,156.45) ; C6.2@184.7,107 v3(185.5,107) ; C6.2@184.806,106.844 cw(c185.183,106.467) v3@185.183,107 ; v3@189.235,105.435 ccw(c189.804,106.004) C5.1@189.804,105.2 ; C5.1@189.635,104.965 ccw(c189.949,105.278) C5.1@190.191,104.907 ; C5.1@189.918,105.326 cw(c189.605,105.805) v3(189.2,105.4) 189.4,105.2 C5.1@190,105.2 ; P3.6@192.65,147.5 P3.6@192.85,147.5 v3(194.2,147.5) ; P3.15@193.05,155.1 P3.15@193.25,155.1 v3(194.2,155.1) ; v3(193.3,143.2) P3.9@195.05,143.2 ; P3.15@193.695,154.821 cw(c194.2,154.503) v3(194.2,155.1) ; P3.15@193.695,155.379 ccw(c194.2,155.697) v3(194.2,155.1) ; P3.14@194.05,158.5 P3.14@194.25,158.5 v3@195.8,158.5 ; P3.9@194.254,142.829 ccw(c193.358,141.933) 193.358,143.2 ccw(c193.358,144.467) P3.9@194.254,143.571 ; P3.14@195.322,158.247 cw(c195.8,157.922) v3@195.8,158.5 ; P3.14@195.322,158.753 ccw(c195.8,159.078) v3@195.8,158.5 ; P3.14@195.538,158.5 ccw(c195.538,158.962) v3@195.865,158.635 ; v3(195.9,158.6) v3@195.8,158.5 ; v7@198.159,100.141 ccw(c197.849,100.451) 198.287,100.451 ; 198.287,100.514 ccw(c198.814,100.514) v7@198.441,100.141 ; C51.2@198.287,101.049 198.287,100.013 v7(198.3,100) ; v4@199.25,125.4 199.555,125.095 ; v4@199.259,125.39 ccw(c199.972,126.103) 199.972,125.095 ; v4@199.274,125.358 ccw(c199.555,125.377) 199.555,125.095 ; C41.1@200.787,125.095 199.555,125.095 ; v3(201.9,158.6) 202,158.5 P3.13@203.75,158.5 ; v3@201.925,158.643 ccw(c202.222,159.153) 202.374,158.583 ; v3@201.935,158.635 ccw(c202.262,158.962) 202.262,158.5 ; P3.13@202.832,158.182 ccw(c202.064,157.414) 202.064,158.5 ccw(c202.064,159.586) P3.13@202.832,158.818 ; P3.13@203.7,158.5 203.9,158.5 P3.13@204,158.6 ; v3(206.1,143.1) P3.11@207.45,143.1 ; P3.11@207.082,142.782 ccw(c206.314,142.014) 206.314,143.1 ccw(c206.314,144.186) P3.11@207.082,143.418 ; C8.2@208.469,161.083 C8.2@208.469,161.431 ; 113.199,95.3 113.276,95.377 ; 113.276,95.377 cw(c113.276,94.906) 113.679,95.15 ccw(c113.276,94.906) 113.276,95.377 ; 113.276,95.377 114.275,96.375 ; v7@113.709,95.113 ccw(c113.256,94.66) 113.256,95.3 cw(c113.256,94.66) v7@113.709,95.113 ; C70.2@160.508,158.369 ccw(c160.962,158.369) 160.744,157.971 cw(c160.962,158.369) C70.2@160.508,158.369 ; v6@166.878,153.728 167.3,154.15
  Bottom Layer w0.75: C31.2@114.15,108 118.1,108 121.25,104.85 121.2,104.8 P5.B4@121.2,104.761 P5.A4@121.2,102.141 ; 120.463,105.637 cw(c119.586,104.761) P5.B4@120.825,104.761 ; P5.A4@120.935,102.407 ccw(c120.295,103.047) 121.2,103.047 ccw(c122.106,103.047) P5.A4@121.466,102.407 ; P5.B4@120.935,104.496 cw(c120.295,103.856) 121.2,103.856 cw(c122.106,103.856) P5.B4@121.466,104.496 ; v8(137.95,106.8) 141.5,106.8 143.45,104.85 P6.A4@143.45,102 ; v8@138.215,106.535 cw(c138.855,105.895) 138.855,106.8 cw(c138.855,107.705) v8@138.215,107.065 ; 142.737,105.563 cw(c141.973,104.799) P6.B4@143.054,104.799 ; 142.912,105.388 ccw(c143.429,105.904) P6.B4@143.429,105.174 ; P6.A4@143.163,102.444 ccw(c142.472,103.136) 143.45,103.136 ; P6.B4@143.163,104.534 cw(c142.472,103.842) 143.45,103.842 ; 143.45,103.032 ccw(c144.282,103.032) P6.A4@143.694,102.444 ; 143.45,103.945 cw(c144.282,103.945) P6.B4@143.694,104.534 ; v8@207.4,162.125 cw(c207.4,161.22) 208.04,161.86 cw(c208.68,162.5) v8@207.775,162.5 ; C8.2@207.847,161.119 ccw(c206.272,161.372) v8(207.4,162.5) C8.2@208.469,161.431 ; P3.12@208.27,158.03 ccw(c207.474,158.826) 208.6,158.826 ; C8.2@208.31,160.924 cw(c207.611,160.225) 208.6,160.225 ; C8.2@208.469,161.083 208.6,160.953 v3(208.6,159.3) 208.6,157.85 P3.12@208.55,157.8
  Bottom Layer w1: C3.2@184.023,166.219 v8(185.554,167.75) 185.904,168.1 U1.1@187.6,168.1 ; C3.2@184.123,166.719 ccw(c184.123,167.685) C3.2@184.806,167.002 ; C3.2@184.243,166.768 ccw(c183.482,168.611) v8@185.323,167.846 ; C3.2@184.623,166.219 cw(c186.072,166.219) v8@185.047,167.243 ; C3.2@184.868,166.932 cw(c185.939,166.314) v8@185.619,167.509 ; v8@185.731,167.573 cw(c187.003,166.301) 187.003,168.1 ; U1.1@187.794,167.692 187.794,170.844 C2.2@188.6,171.65 ; 187.794,168.905 cw(c191.038,168.905) C2.2@188.744,171.2
  Bottom Layer w1.5: C1.2@200.713,162.456 ccw(c197.365,165.804) P1.2@202.1,165.804 ; C1.2@200.89,162.179 202.1,163.389 P1.2@202.1,167.1
  other v1: 131.1,169.7
  other v2: 117.304,161.5 118.504,161.5 119.704,161.5 120.904,161.5 122.104,161.5 123.304,161.5 124.504,161.5 117.304,162.7 118.504,162.7 119.704,162.7 120.904,162.7 122.104,162.7 123.304,162.7 124.504,162.7 117.304,163.9 118.504,163.9 119.704,163.9 120.904,163.9 122.104,163.9 123.304,163.9 124.504,163.9 117.304,165.1 118.504,165.1 119.704,165.1 120.904,165.1 122.104,165.1 123.304,165.1 124.504,165.1 117.304,166.3 118.504,166.3 119.704,166.3 120.904,166.3 122.104,166.3 123.304,166.3 124.504,166.3 117.304,167.5 118.504,167.5 119.704,167.5 120.904,167.5 122.104,167.5 123.304,167.5 124.504,167.5 117.304,168.7 118.504,168.7 119.704,168.7 120.904,168.7 122.104,168.7 123.304,168.7 124.504,168.7
  other v3: 204.15,125.875 113.375,182.125 120.475,183.375
  other v4: 123.26,116.275 124.46,116.275 125.66,116.275 123.26,117.475 124.46,117.475 125.66,117.475 123.26,118.675 124.46,118.675 125.66,118.675 194.424,124.155 195.624,124.155 196.824,124.155 198.024,124.155 199.224,124.155 194.424,125.355 195.624,125.355 196.824,125.355 198.024,125.355 199.224,125.355 194.424,126.555 195.624,126.555 196.824,126.555 198.024,126.555 199.224,126.555 194.424,127.755 195.624,127.755 196.824,127.755 198.024,127.755 194.424,128.955 195.624,128.955 196.824,128.955 160.177,162.685 161.377,162.685 162.577,162.685 160.177,163.885 161.377,163.885 162.577,163.885 160.177,165.085 161.377,165.085 162.577,165.085
  other v5: 122.4,136.25 156.35,166.6
  other v6: 178.95,161.7 175.35,162.6
  other v9: 148.8,172.7 112,178.45 113.6,178.45 120,178.7
GPIO_30: P20.34
GPMC_A1: P20.92 RR3.8 | length 34.4
  Top Layer w0.21: P20.92@177.15,127.35 179,127.35 v1(178.9,127.25) ; P20.92@178.053,127.197 cw(c178.421,126.829) 178.421,127.35 ; P20.92@178.066,127.35 cw(c178.066,126.416) v1@178.726,127.077 ; 178.55,127.35 ccw(c178.55,127.599) v1@178.726,127.423 ; v1@200.227,137.677 cw(c199.857,137.307) 200.38,137.307 ; RR3.8@200.313,136.796 ccw(c200.151,136.958) 200.38,136.958 ccw(c200.609,136.958) RR3.8@200.447,136.796 ; RR3.8@200.38,136.429 200.38,137.87 v1(200.4,137.85) ; 200.38,137.21 cw(c201.04,137.21) v1@200.573,137.677
  Bottom Layer w0.21: v1(178.9,127.25) 179,127.35 183.1,127.35 183.635,127.885 184.591,127.885 185.835,129.129 185.835,129.614 190.835,134.615 197.764,134.615 200,136.851 200,137.45 ; v1@179.073,127.077 cw(c179.733,126.416) 179.733,127.35 ; v1@179.073,127.423 ccw(c179.249,127.599) 179.249,127.35 ; v1@200.155,137.842 cw(c199.625,137.825) 200,137.45 ; v1@200.392,137.605 ccw(c200.375,137.075) 200,137.45 ; v1(200.4,137.85) 200,137.45
GPMC_A2: P20.91 RR3.7 | length 32.3
  Top Layer w0.21: P20.91@181.6,127.3 184.05,127.3 v1(184.05,127.2) ; P20.91@182.453,127.197 cw(c182.7,126.95) 182.7,127.3 cw(c182.7,127.65) P20.91@182.453,127.403 ; 183.216,127.3 cw(c183.216,126.366) v1@183.876,127.027 ; 183.7,127.3 ccw(c183.7,127.549) v1@183.876,127.373 ; v1@201.007,138.347 cw(c200.589,137.929) 201.18,137.929 cw(c201.771,137.929) v1@201.353,138.347 ; RR3.7@201.113,136.796 ccw(c200.951,136.958) 201.18,136.958 ccw(c201.409,136.958) RR3.7@201.247,136.796 ; RR3.7@201.18,136.429 v1(201.18,138.52)
  Bottom Layer w0.21: v1(184.05,127.2) 184.325,127.475 184.761,127.475 ; v1@184.083,127.189 cw(c184.473,127.065) 184.473,127.475 ; v1@184.283,127.126 cw(c184.761,126.974) 184.761,127.475 ; v1@201.007,138.347 cw(c200.589,137.929) 201.18,137.929 cw(c201.771,137.929) v1@201.353,138.347 ; v1(201.18,138.52) 201.18,137.704 200.671,137.195 200.545,137.195 200.41,137.06 200.41,136.681 197.934,134.205 191.005,134.205 186.245,129.445 186.245,128.959 184.761,127.475
GPMC_A3: P20.90 RR3.6 | length 37.4
  Top Layer w0.21: P20.90@177.4,128.15 v1(179.35,128.15) ; P20.90@178.053,127.997 cw(c178.421,127.629) 178.421,128.15 ; v1@179.177,127.977 ccw(c178.759,127.559) 178.759,128.15 ccw(c178.759,128.741) v1@179.177,128.323 ; v1@201.827,137.627 cw(c201.457,137.257) 201.98,137.257 ; RR3.6@201.913,136.796 ccw(c201.751,136.958) 201.98,136.958 ccw(c202.209,136.958) RR3.6@202.047,136.796 ; RR3.6@201.98,136.429 201.98,137.78 v1(202,137.8) ; 201.98,137.16 cw(c202.64,137.16) v1@202.173,137.627
  Bottom Layer w0.21: v1(179.35,128.15) 183.25,128.15 183.4,128.3 183.873,128.3 183.878,128.295 184.421,128.295 185.425,129.298 185.425,129.784 190.665,135.025 197.594,135.025 199.59,137.021 199.59,137.966 200.75,139.126 200.86,139.126 200.909,139.175 201.451,139.175 201.835,138.791 201.835,137.965 v1(202,137.8) ; v1@179.523,127.977 cw(c179.941,127.559) 179.941,128.15 cw(c179.941,128.741) v1@179.523,128.323 ; 201.835,138.283 ccw(c202.483,138.283) v1@202.025,137.825 ; 201.835,138.79 ccw(c202.99,138.79) v1@202.173,137.973